# Altium PCB PCB.PcbDoc
Units mm, origin at the board's own origin, x right, y up, seen from the top; angles counter-clockwise.
Board outline 91 x 66 mm, 2 copper layers (Top Layer, Bottom Layer), stack 1.58 mm thick; 46 components, 41 nets, 152 pads, 193 vias.
Unrouted connection lines stored in the file: 4.
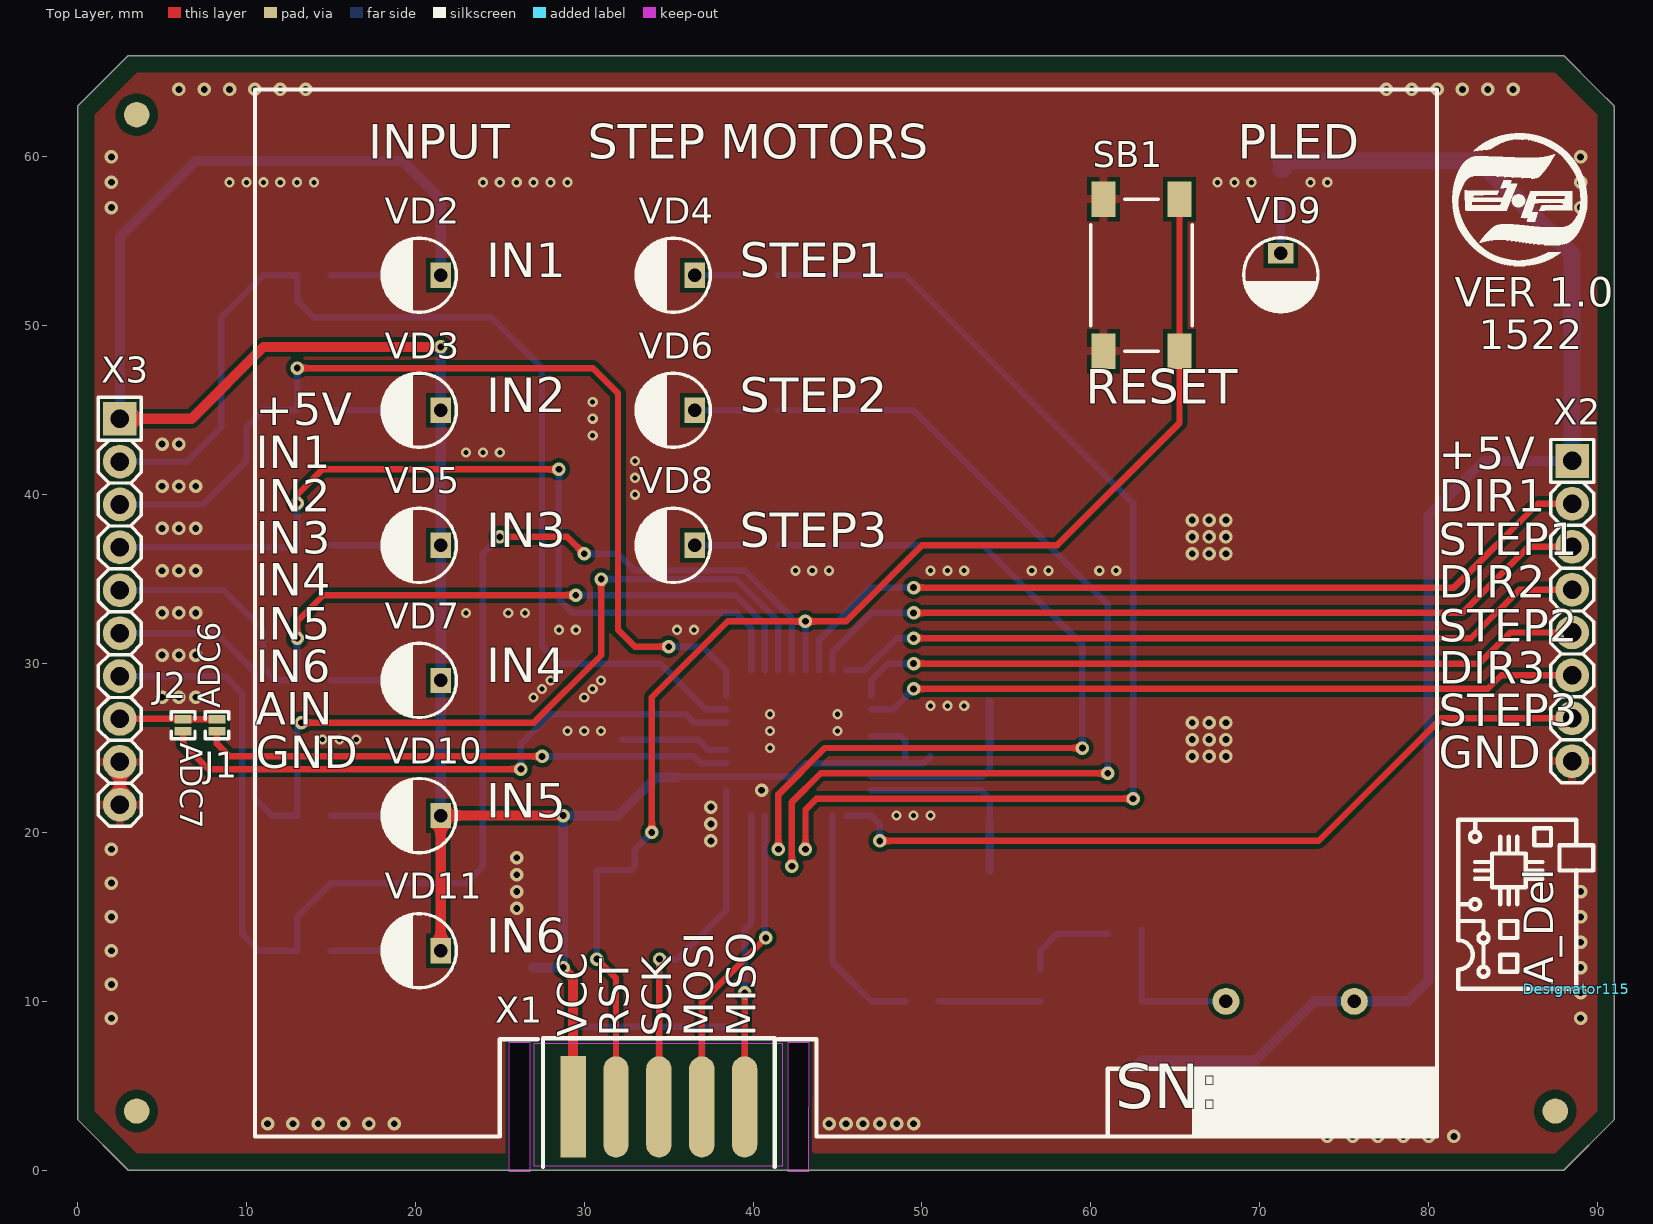
[diagram p0: Top Layer view]
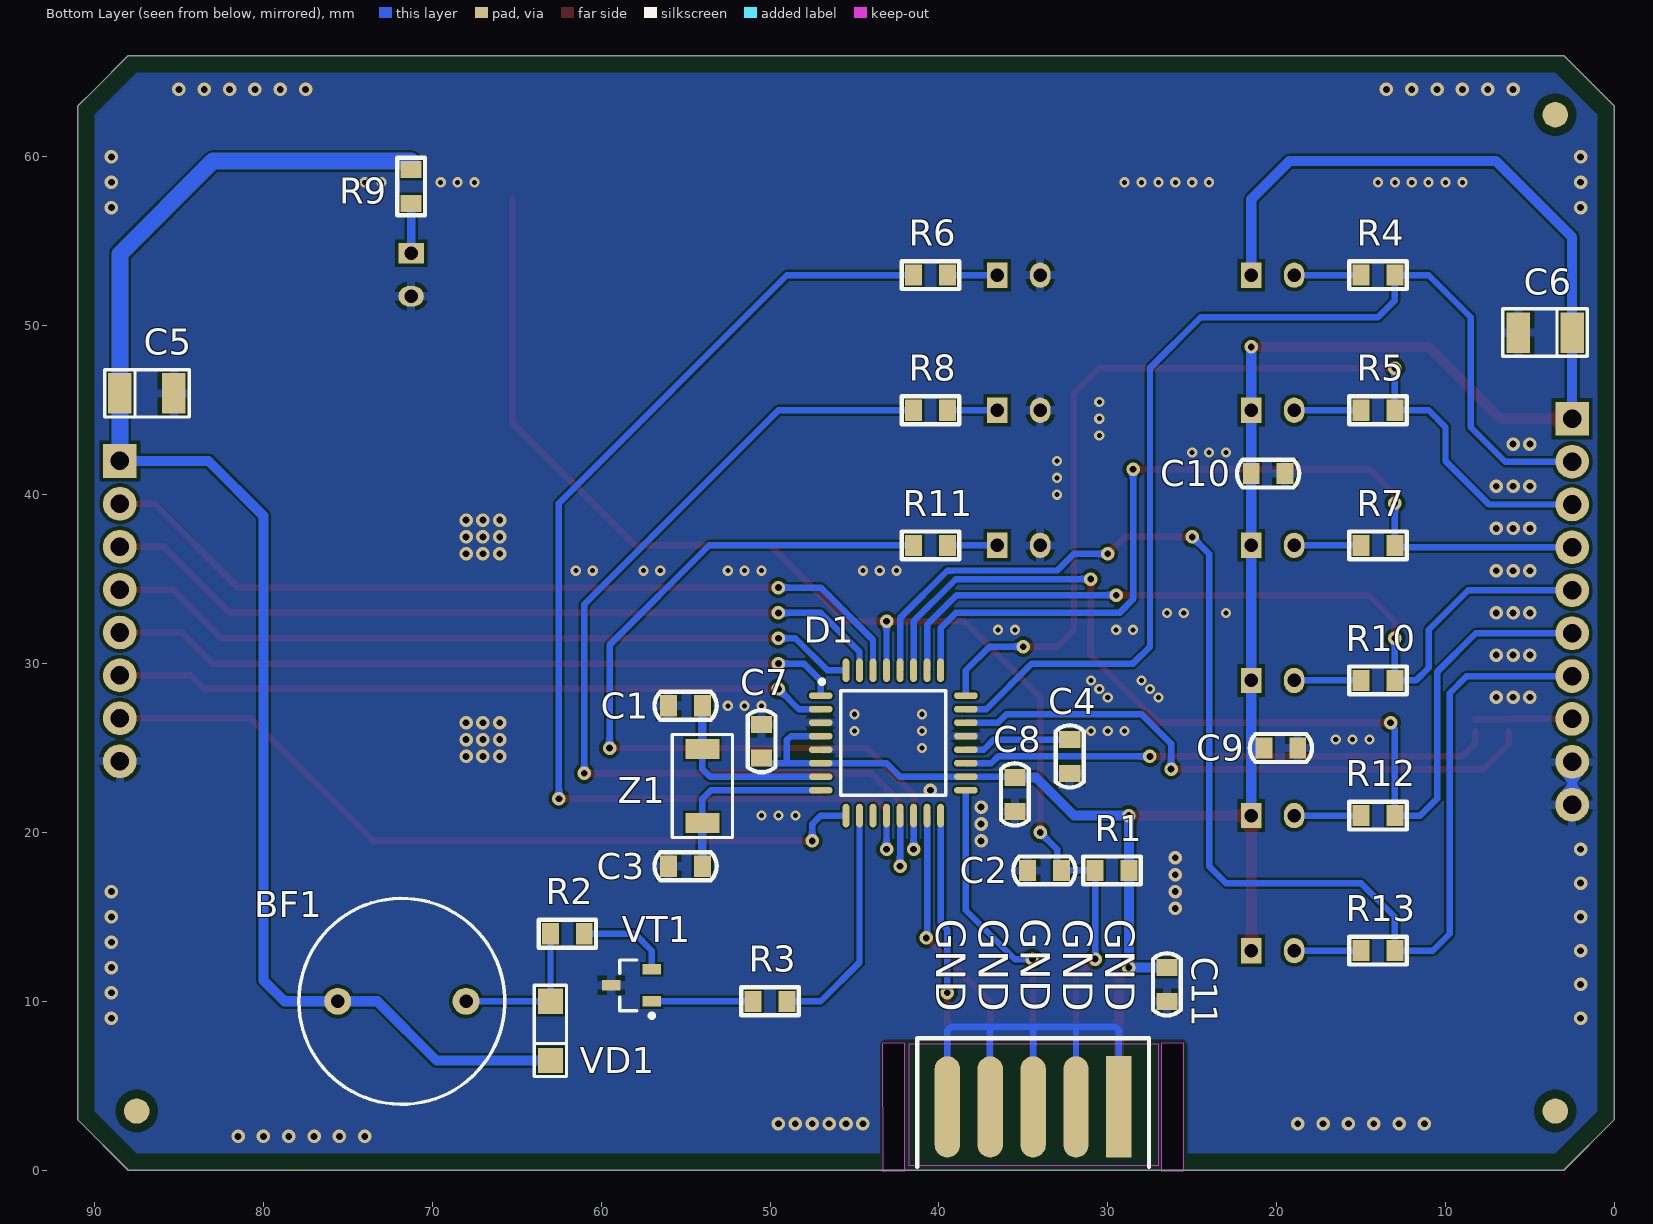
[diagram p1: Bottom Layer view, seen from below]
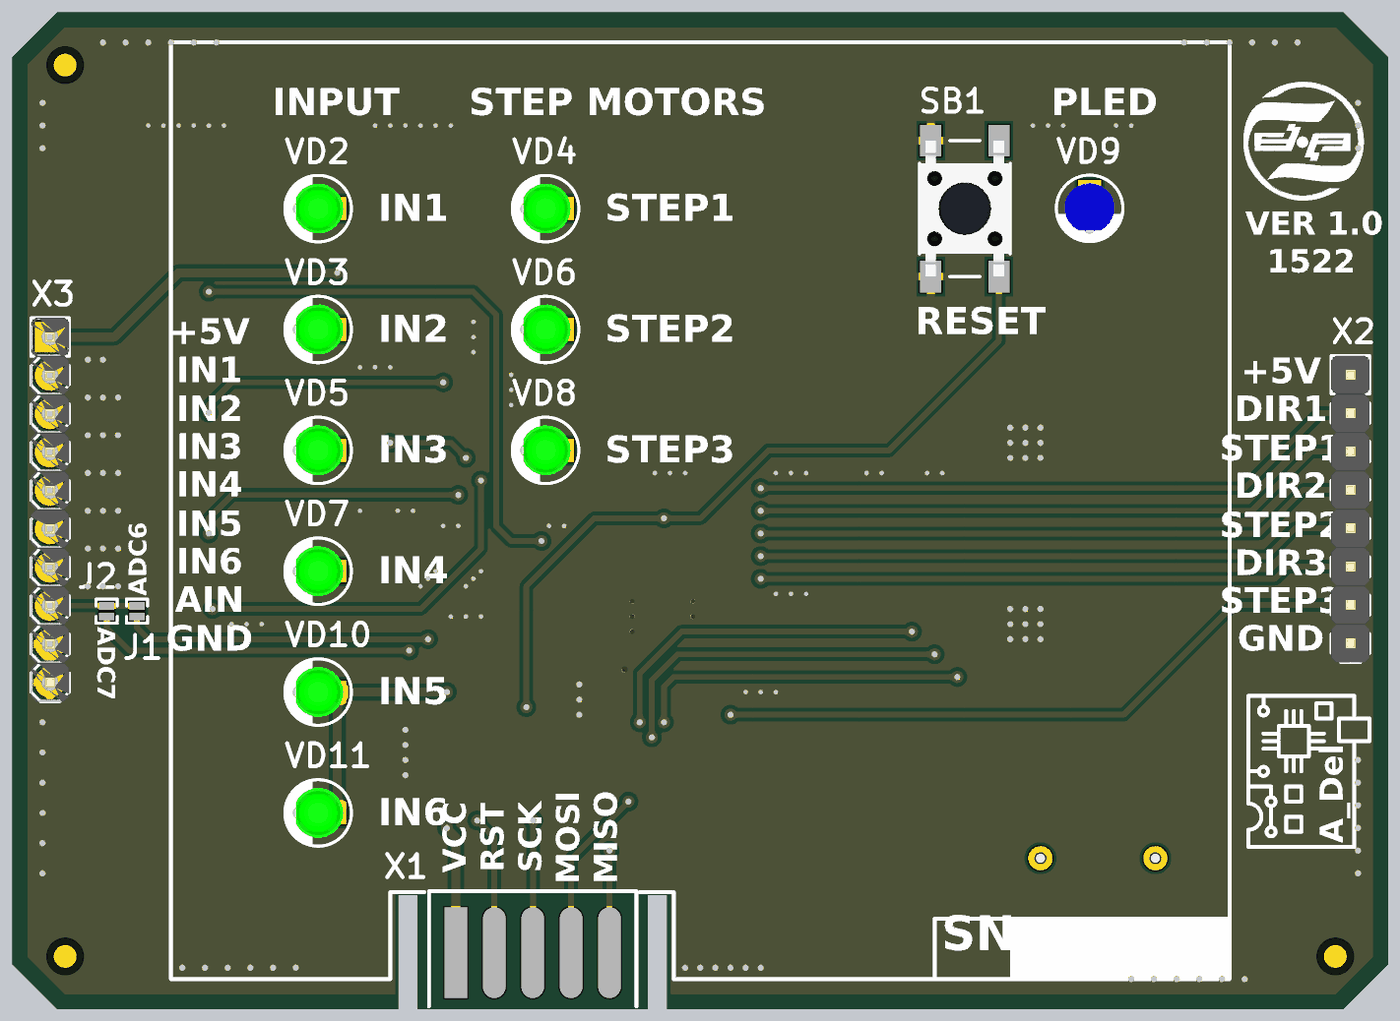
[diagram p2: 3D render of the assembled board from above, using the file's embedded part models]
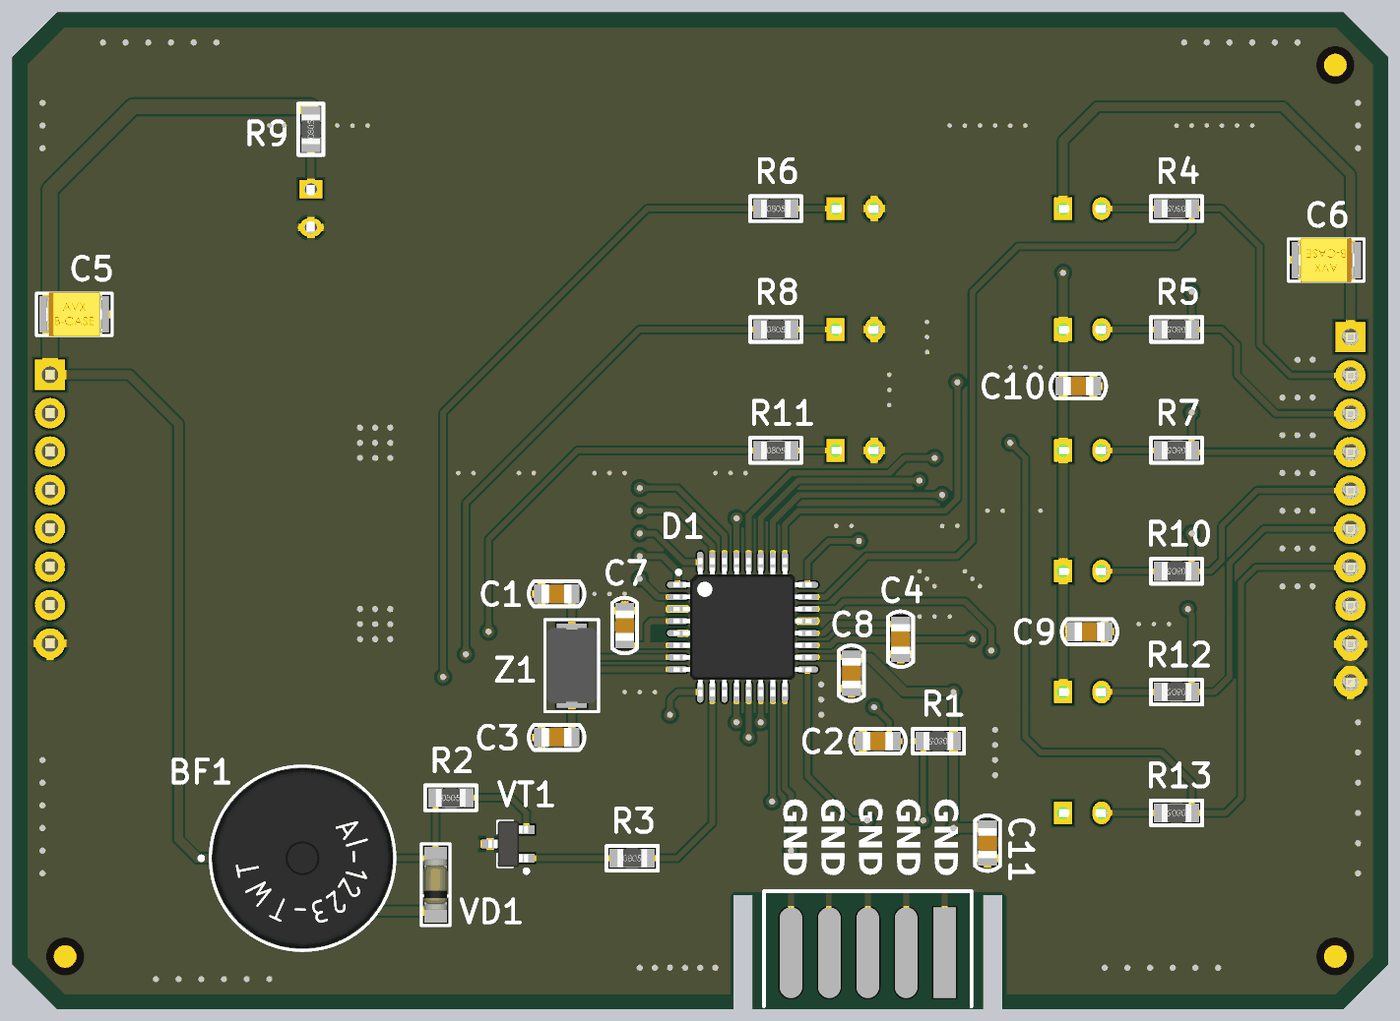
[diagram p3: 3D render of the assembled board from below, using the file's embedded part models]

## Layer stack, top to bottom
Top Solder: solder mask 0.0102, Solder Resist, Dk 3.5
Top Layer: signal copper 0.0356
Dielectric 1: dielectric 1.509, FR-4, Dk 4.8
Bottom Layer: signal copper 0.0356
Bottom Solder: solder mask 0.0102, Solder Resist, Dk 3.5

## Board outline
0,3 0,63 3,66 88,66 90,64 91,63 91,3 88,0 3,0

## Design rules (kind name [scope] priority, off if disabled: settings)
BoardOutlineClearance [All] p1: gap=0 ignorepadtopadclearanceinfootprint=FALSE
Clearance "Clearance Bottom Layer" [OnLayer('Bottom Layer')] p1: gap=0.127 ignorepadtopadclearanceinfootprint=TRUE except(0.203: THPad-THPad THPad-Via THPad-Fill THPad-Poly THPad-Region THPad-Hole Via-Via Via-Fill Via-Poly Via-Region Via-Hole Text-Hole; 0.254: THPad-Text Via-Text Text-Text)
Clearance "Clearance Top Layer" [OnLayer('Top Layer')] p2: gap=0.127 ignorepadtopadclearanceinfootprint=TRUE except(0.203: THPad-THPad THPad-Via THPad-Fill THPad-Region THPad-Hole Via-Via Via-Fill Via-Region Via-Hole Fill-Fill Fill-Region Fill-Hole Poly-Region Poly-Hole Region-Region Region-Hole Text-Hole; 0.254: Arc-Poly Track-Poly SMDPad-Poly THPad-Poly THPad-Text Via-Poly Via-Text Fill-Poly Fill-Text Poly-Poly Poly-Text Region-Text Text-Text)
Clearance [All] p3: gap=0.2 ignorepadtopadclearanceinfootprint=FALSE except(0: Text-Text; 0.127: Arc-Arc Arc-SMDPad Arc-THPad Arc-Fill Arc-Region Arc-Text Arc-Hole; 0.254: Arc-Poly THPad-Poly THPad-Text Via-Poly Via-Text Fill-Poly Fill-Text Poly-Poly Poly-Text Region-Text)
HoleSize [All] p1: absolutevalues=TRUE maxlimit=50 minlimit=0.3 maxpercent=80.000 minpercent=20.000
MinimumAnnularRing [All] p1: minimumring=0.076
MinimumSolderMaskSliver [All] p1: minsoldermaskwidth=0.1
PolygonConnect PolygonConnect_1 [All] p1: thpad.connectstyle=Relief thpad.reliefconductorwidth=0.508 thpad.reliefentries=4 thpad.polygonreliefangle="90 Angle" thpad.airgapwidth=0.254 smdpad.connectstyle=Relief smdpad.reliefconductorwidth=0.508 smdpad.reliefentries=4 smdpad.polygonreliefangle="90 Angle" smdpad.airgapwidth=0.254 via.connectstyle=Direct via.reliefconductorwidth=0.508 via.reliefentries=4 via.polygonreliefangle="90 Angle" via.airgapwidth=0.254
RoutingCorners [All] p1: cornerstyle=Round minsetback=2.54 maxsetback=2.54
RoutingVias [All] p1: holewidth=0.6 width=1 viastyle="Through Hole" minholewidth=0.3 minwidth=0.6 maxholewidth=1 maxwidth=2
SilkToSilkClearance [All] p1: silktosilkclearance=0
SilkToSolderMaskClearance [IsPad] p1: minsilkscreentomaskgap=0 clearancetoexposedcopper=TRUE
SolderMaskExpansion [All] p1: expansion=0.102 istentingtop=FALSE
Width [All] p1: maxlimit=2.54 minlimit=0.127 preferedwidth=0.381
25 further rules are at their usual default settings.

## Components (designator, comment, footprint, x,y, rotation, side; value= is the part's Value field where it differs from the comment)
BF1 "DIP switch, 2.73 kHz, 3VDC, 80mA, -20...+70°C" "BUZ: AI-1223-TWT-3V-2-R" 71.8,10 r180 bottom
C1 "Керамический SMD" "CAP: 0805" 55,27.5 r0 bottom
C2 "Керамический SMD" "CAP: 0805" 33.75,17.75 r0 bottom
C3 "Керамический SMD" "CAP: 0805" 55,18 r0 bottom
C4 "Керамический SMD" "CAP: 0805" 32.25,24.5 r270 bottom
C5 "" "CAP: TANTAL-B" 86.9,46 r180 bottom
C6 "" "CAP: TANTAL-B" 4.1,49.6 r0 bottom
C7 "Керамический SMD" "CAP: 0805" 50.5,25.4 r270 bottom
C8 "Керамический SMD" "CAP: 0805" 35.5,22.25 r90 bottom
C9 "Керамический SMD" "CAP: 0805" 19.75,25 r0 bottom
C10 "Керамический SMD" "CAP: 0805" 20.5,41.25 r0 bottom
C11 "Керамический SMD" "CAP: 0805" 26.5,11 r90 bottom
D1 "ATMega8A" 32-LQFP 42.7,25.3 r180 bottom
Designator115 "Comment" PCB_LOGO 88.75,10.75 r90 top
J1 "" "CON: JUMPER x1" 8.25,26.7 r270 top
J2 "" "CON: JUMPER x1" 6.25,26.7 r270 top
R1 "Резистор SMD, 4.7K, ±1%, 0805, 0.125W, -55...+125°C" "RES: 0805" 29.75,17.75 r0 bottom value=4.7K
R2 "Резистор SMD, 33R, ±1%, 0805, 0.125W, -55...+125°C" "RES: 0805" 62,14 r180 bottom value=33R
R3 "Резистор SMD, 1K, ±1%, 0805, 0.125W, -55...+125°C" "RES: 0805" 50,10 r180 bottom value=1K
R4 "Резистор SMD, 1K, ±1%, 0805, 0.125W, -55...+125°C" "RES: 0805" 14,53 r0 bottom value=1K
R5 "Резистор SMD, 1K, ±1%, 0805, 0.125W, -55...+125°C" "RES: 0805" 14,45 r0 bottom value=1K
R6 "Резистор SMD, 1K, ±1%, 0805, 0.125W, -55...+125°C" "RES: 0805" 40.5,53 r180 bottom value=1K
R7 "Резистор SMD, 1K, ±1%, 0805, 0.125W, -55...+125°C" "RES: 0805" 14,37 r0 bottom value=1K
R8 "Резистор SMD, 1K, ±1%, 0805, 0.125W, -55...+125°C" "RES: 0805" 40.5,45 r180 bottom value=1K
R9 "Резистор SMD, 1K, ±1%, 0805, 0.125W, -55...+125°C" "RES: 0805" 71.25,58.25 r90 bottom value=1K
R10 "Резистор SMD, 1K, ±1%, 0805, 0.125W, -55...+125°C" "RES: 0805" 14,29 r0 bottom value=1K
R11 "Резистор SMD, 1K, ±1%, 0805, 0.125W, -55...+125°C" "RES: 0805" 40.5,37 r180 bottom value=1K
R12 "Резистор SMD, 1K, ±1%, 0805, 0.125W, -55...+125°C" "RES: 0805" 14,21 r0 bottom value=1K
R13 "Резистор SMD, 1K, ±1%, 0805, 0.125W, -55...+125°C" "RES: 0805" 14,13 r0 bottom value=1K
SB1 "Tactile button, 6x6mm" "BUT: 6x6 SMD" 63,53 r270 top
VD1 "Single diode, 75V, 150mA, 1V, 4ns, SOD-80, -55...+150°C" "DIODE: SOD80" 63,8.25 r270 bottom
VD2 "LED, Green, *, *, *, -55...+150°C" "LED: 3mmG" 21.5,53 r180 top
VD3 "LED, Green, *, *, *, -55...+150°C" "LED: 3mmG" 21.5,45 r180 top
VD4 "LED, Green, *, *, *, -55...+150°C" "LED: 3mmG" 36.54,53 r180 top
VD5 "LED, Green, *, *, *, -55...+150°C" "LED: 3mmG" 21.5,37 r180 top
VD6 "LED, Green, *, *, *, -55...+150°C" "LED: 3mmG" 36.54,45 r180 top
VD7 "LED, Green, *, *, *, -55...+150°C" "LED: 3mmG" 21.5,29 r180 top
VD8 "LED, Green, *, *, *, -55...+150°C" "LED: 3mmG" 36.54,37 r180 top
VD9 "\"+5V\"" "LED: 3mmB" 71.25,54.29 r270 top
VD10 "LED, Green, *, *, *, -55...+150°C" "LED: 3mmG" 21.5,21 r180 top
VD11 "LED, Green, *, *, *, -55...+150°C" "LED: 3mmG" 21.5,13 r180 top
VT1 "NPN transistor, 45V, 100mA, 100MHz, 300mW, 0.6V, 420, SOT-23, -55...+125°C" SOT23 58.2,10.95 r0 bottom
X1 "Connector, 6pin, 2.54mm, 250VAC, 3A" "CON: PROG(PCB) ISP" 29.308,3.832 r90 top
X2 "Connector, 8pin, 2.54mm, 500VAC, 3A" "CON: PLS-8" 88.5,33.11 r270 top
X3 "Connector, 10pin, 2.54mm, 500VAC, 3A" "CON: PLS-10" 2.5,33.07 r270 top
Z1 "Crystal, 16MHz, 18pF, ±20ppm, ABM3, -40...+85°C" "OSC: 5032_ABM3" 54,22.75 r90 bottom

## Footprints (in the part's own frame and the unit in brackets; to place one, negate y for a bottom-side part, rotate by r counter-clockwise, add the part's x,y. Pads: shape width x height; smd on the part's side, far side on the other; paste and mask are expansions set on the pad)
32-LQFP [mm] "pitch 0.8 mm"
  rrect100% 1.4x0.4 smd: 1(-4.3,2.8) 2(-4.3,2) 3(-4.3,1.2) 4(-4.3,0.4) 5(-4.3,-0.4) 6(-4.3,-1.2) 7(-4.3,-2) 8(-4.3,-2.8) 17(4.3,-2.8) 18(4.3,-2) 19(4.3,-1.2) 20(4.3,-0.4) 21(4.3,0.4) 22(4.3,1.2) 23(4.3,2) 24(4.3,2.8)
  rrect100% 0.4x1.4 smd: 9(-2.8,-4.3) 10(-2,-4.3) 11(-1.2,-4.3) 12(-0.4,-4.3) 13(0.4,-4.3) 14(1.2,-4.3) 15(2,-4.3) 16(2.8,-4.3) 25(2.8,4.3) 26(2,4.3) 27(1.2,4.3) 28(0.4,4.3) 29(-0.4,4.3) 30(-1.2,4.3) 31(-2,4.3) 32(-2.8,4.3)
  round 0.5 on Mech2: ""(-4,4)
  silkscreen extent -4.35,-3.1 3.1,3.75, body extent -4.57,-4.57 4.57,4.57, height 1.62
"BUT: 6x6 SMD" [mm] "Leaded Tactile Button 6x6"
  rect 2.1x1.4 smd: 1(-4.5,2.25) 1(4.5,2.25) 2(-4.5,-2.25) 2(4.5,-2.25)
  silkscreen extent -4.5,-3 4.5,3, body extent -4.5,-3 4.5,3, height 4.3
"BUZ: AI-1223-TWT-3V-2-R" [mm]
  round 1.6 hole 0.8: 1(-3.8,0) 2(3.8,0)
  round 0.5 on Bottom Overlay: ""(-6.7,0)
  round 0.5 on Mech2: ""(-5.4,0)
  silkscreen extent -6.1,-6.1 6.1,6.1, body extent -6,-6 6,6, height 7.55
"CAP: 0805" [mm]
  rect 1x1.25 smd: 1(-1,0) 2(1,0)
  silkscreen extent -1.84,-0.82 1.84,0.82, body extent -1,-0.62 1,0.63, height 1
"CAP: TANTAL-B" [mm]
  rect 1.4x2.4 smd: 1(-1.6,0) 2(1.6,0)
  silkscreen extent -2.5,-1.4 2.5,1.4, body extent -1.85,-1.46 1.85,1.47, height 2.03
"CON: JUMPER x1" [mm]
  rect 0.5x1 smd: 1(0,0) 2(0.7,0)
  silkscreen extent -0.45,-0.7 1.15,0.7
"CON: PLS-8" [mm] "PLS-40 8 pin header"
  rect 2x2 hole 1.1: 1(-8.89,0)
  round 2 hole 1.1: 2(-6.35,0) 3(-3.81,0) 4(-1.27,0) 5(1.27,0) 6(3.81,0) 7(6.35,0) 8(8.89,0)
  silkscreen extent -10.16,-1.27 10.16,1.27, body extent -10.16,-1.27 10.16,1.27, height 8.54
"CON: PLS-10" [mm] "PLS-40 10 pin header"
  rect 2x2 hole 1.1: 1(-11.43,0)
  round 2 hole 1.1: 2(-8.89,0) 3(-6.35,0) 4(-3.81,0) 5(-1.27,0) 6(1.27,0) 7(3.81,0) 8(6.35,0) 9(8.89,0) 10(11.43,0)
  silkscreen extent -12.7,-1.27 12.7,1.27, body extent -12.7,-1.27 12.7,1.27, height 8.54
"CON: PROG(PCB) ISP" [mm] "IDC-6MS 6 pin PCB-mount connector"
  rect 6x1.5 smd: 1(-0.082,-0.032)
  oval 6x1.5 smd: 2(-0.082,-2.572) 3(-0.082,-5.112) 4(-0.082,-7.652) 5(-0.082,-10.192)
  rect 6x1.5 smd far side: 6(-0.082,-0.032)
  oval 6x1.5 smd far side: 7(-0.082,-2.572) 8(-0.082,-5.112) 9(-0.082,-7.652) 10(-0.082,-10.192)
  Keep-Out Layer board cut-out: -3.892,-14.003 -3.889,-14 3.728,-14.003 3.728,-12.732 1.188,-12.732 -3.892,-12.732
  Keep-Out Layer board cut-out: -3.892,2.507 -3.889,2.51 3.728,2.507 3.728,3.778 1.188,3.778 -3.892,3.778
  silkscreen extent -3.64,-11.97 3.98,1.75
"DIODE: SOD80" [mm]
  rect 1.5x1.5 smd: 1(-1.75,0) 2(1.75,0)
  silkscreen extent -2.7,-0.95 2.7,0.95, body extent -1.68,-0.78 1.68,0.76, height 1.52
"LED: 3mmB" [mm]
  rect 1.2x1.5 hole 0.8: 1(0,0)
  oval 1.2x1.5 hole 0.8: 2(2.54,0)
  silkscreen extent -0.93,-2.2 3.47,2.2, body extent -0.39,-1.65 2.82,1.64, height 4.98
"LED: 3mmG" [mm]
  rect 1.2x1.5 hole 0.8: 1(0,0)
  oval 1.2x1.5 hole 0.8: 2(2.54,0)
  silkscreen extent -0.93,-2.2 3.47,2.2, body extent -0.39,-1.65 2.82,1.64, height 4.98
"OSC: 5032_ABM3" [mm]
  rect 1.2x2 smd: 1(-2.197,0) 2(2.197,0)
  silkscreen extent -3.05,-1.78 3.05,1.78, body extent -2.5,-1.65 2.5,1.65, height 1.3
PCB_LOGO [mm]
  silkscreen extent 0,-1 10,7
"RES: 0805" [mm]
  rect 1x1.25 smd: 1(-1,0) 2(1,0)
  silkscreen extent -1.7,-0.82 1.7,0.82, body extent -1,-0.6 1,0.6, height 0.44
SOT23 [mm]
  rect 1.1x0.6 smd: 1(-1.2,0.95) 2(-1.2,-0.95) 3(1.2,0)
  round 0.5 on Mech2: ""(-0.9,1.1)
  silkscreen extent -1.32,-1.5 0.7,1.92, body extent -1.32,-1.52 1.32,1.52, height 1.12

## Part data
BF1: library part Buzzer, CurrentMax=80mA, Frequency="2.73 kHz", Manufacturer="PUI Audio", PartNumber=AT-0927-TT-6-R, Temperature=-20...+70°C, VoltageMax=3VDC, HelpURL=https://www.digikey.com/products/en?keywords=AT-0927-TT-6-R, TypeBuzzer="DIP switch", ValueManufacturerPartNumber="DIP switch, 2.73 kHz, 3VDC, 80mA, -20...+70°C"
C5 C6: library part "Танталы SMD", Значение=22uF, Напряжение=10V, Производитель=AVX, Ссылка=***, ТипКомпонента="Tantalum capacitor", Типоразмер="Тип А (3216)", Точность=±10%, УникальныйНомер=F930J107KAAAJ6
D1: library part ATmega8, "Корпус TQFP-44, Ядро AVR, Максимальная частота ядра 20 МГц, Объём памяти программ 65.54 кБайт, Объём EEPROM памяти 2.05 кБайт, Объём оперативной памяти 4.1 кБайт, Интерфейсы I²C, SPI, UART/USART, Периферия Brown-out Detect/Reset, POR, PWM, WDT, АЦП/ЦАП A/D 8x10b, Напряжение питания, min 2.7 В, Напряжение питания, max 5.5 В"
J1 J2: library part Jumper_2_pin
  J1: CommentText="\"ADC6\""
  J2: CommentText="\"ADC7\""
R1 R2 R4 R5 R6 R7 R8 R9 R10 R11 R12 R13: library part Resistor_0805_ieee, Manufacturer="Vishay Intertech", Package=0805, PartNumber=CRCW080533R0FKEA, Power=0.125W, Temperature=-55...+125°C, Tolerance=±1%, TypeResistor="Резистор SMD", HelpURL=https://www.digikey.com/product-detail/en/yageo/RC0805JR-07100RL/311-100ARCT-ND/731185
  R1: ValueManufacturerPartNumber="Резистор SMD, 4.7K, ±1%, 0805, 0.125W, -55...+125°C"
  R2: ValueManufacturerPartNumber="Резистор SMD, 33R, ±1%, 0805, 0.125W, -55...+125°C"
  R4 R5 R6 R7 R8 R9 R10 R11 R12 R13: ValueManufacturerPartNumber="Резистор SMD, 1K, ±1%, 0805, 0.125W, -55...+125°C"
R3: library part Resistor_0805_ieee, Manufacturer="Vishay Intertech", Package=0805, PartNumber=CRCW08051K00JNEA, Power=0.125W, Temperature=-55...+125°C, Tolerance=±1%, TypeResistor="Резистор SMD", HelpURL=https://www.digikey.com/product-detail/en/yageo/RC0805JR-07100RL/311-100ARCT-ND/731185, ValueManufacturerPartNumber="Резистор SMD, 1K, ±1%, 0805, 0.125W, -55...+125°C"
SB1: library part Button_tactile, Manufacturer="TE Connectivity", Package=6x6mm, PartNumber=FSM2JSMAATR, CommentText="\"RESET\"", HelpURL=https://www.digikey.com/product-detail/en/te-connectivity-alcoswitch-switches/FSM2JSMAATR/450-1792-1-ND/3503931, TypeButton="Tactile button", ValueManufacturerPartNumber="Tactile button, 6x6mm"
VD1: library part Diode_single, Current=150mA, Manufacturer="Vishay Intertech", Package=SOD-80, PartNumber=LL4148-M-08, Temperature=-55...+150°C, Voltage=75V, VoltageDrop=1V, HelpURL=https://www.digikey.com/product-detail/en/micro-commercial-co/1N4148WX-TP/1N4148WXTPMSCT-ND/717312, RecoveryTime=4ns, TypeDiode="Single diode", ValueManufacturerPartNumber="Single diode, 75V, 150mA, 1V, 4ns, SOD-80, -55...+150°C"
VD2 VD3 VD4 VD5 VD6 VD7 VD8 VD10 VD11: library part LED_single, Color=GREEN, ColorParameter=Green, Temperature=-55...+150°C, TypeDiode=LED, ValueManufacturerPartNumber="LED, Green, *, *, *, -55...+150°C"
VD9: library part LED_single, Color=GREEN, ColorParameter=Green, Temperature=-55...+150°C, ValueManufacturerPartNumber="LED, Green, *, *, *, -55...+150°C", TypeDiode=LED
VT1: library part BJT_NPN_123, CurrentCE=100mA, CurrentGain=420, Frequency=100MHz, Manufacturer="ON Semiconductor", MaxPower=300mW, Package=SOT-23, PartNumber=BC847, Temperature=-55...+125°C, VoltageCE=45V, VoltageSaturation=0.6V, HelpURL=https://www.digikey.com/product-detail/en/on-semiconductor/BC847CLT1G/BC847CLT1GOSCT-ND/917836, TypeTransistor="NPN transistor", ValueManufacturerPartNumber="NPN transistor, 45V, 100mA, 100MHz, 300mW, 0.6V, 420, SOT-23, -55...+125°C"
X1: library part Connector_ISP_PCB, CurrentMax=3A, Manufacturer=Connfly, PartNumber=IDC-6, VoltageMax=250VAC, CommentText="\"Разъем\"", HelpURL=https://ru.aliexpress.com/item/1719644716.html?spm=a2g0v.search0104.3.23.4d9c1bc6xlIt6Q&ws_ab_test=searchweb0_0%2Csearchweb201602_10_10065_10068_319_317_10696_453_10084_454_10083_10618_10307_10301_537_536_10059_10884_10887_321_322_10915_10103_10914_10911_10910%2Csearchweb201603_52%2CppcSwitch_0&algo_expid=18a75006-9775-490c-9b34-8e5eba9edd8d-3&algo_pvid=18a75006-9775-490c-9b34-8e5eba9edd8d&transAbTest=ae803_5, Multichannel=6pin, Pitch=2.54mm, TypeConnector=Connector, ValueManufacturerPartNumber="Connector, 6pin, 2.54mm, 250VAC, 3A"
X2: library part PLS-8, CurrentMax=3A, Manufacturer=Connfly, VoltageMax=500VAC, CommentText="\"Разъем\"", HelpURL=https://www.chipdip.ru/product/pls-8-ds1021-1-8sf112, Multichannel=8pin, PartNumber=PLS-8, Pitch=2.54mm, TypeConnector=Connector, ValueManufacturerPartNumber="Connector, 8pin, 2.54mm, 500VAC, 3A"
X3: library part PLS-10, CurrentMax=3A, Manufacturer=Connfly, VoltageMax=500VAC, CommentText="\"MainBoard_INPUT\"", HelpURL=https://www.chipdip.ru/product/pls-10, Multichannel=10pin, PartNumber=PLS-10, Pitch=2.54mm, TypeConnector=Connector, ValueManufacturerPartNumber="Connector, 10pin, 2.54mm, 500VAC, 3A"
Z1: library part Crystal_5032_ABM3, Frequency=16MHz, LoadCapacitance=18pF, Manufacturer="ABRACON LLC", Package=ABM3, PartNumber=ABM3-16.000MHZ-D2Y-T, Temperature=-40...+85°C, Tolerance=±20ppm, HelpURL=https://www.digikey.com/product-detail/en/epson/FC-135-32.7680KA-A5/SER4103CT-ND/6188447, TypeOscilator=Crystal, ValueManufacturerPartNumber="Crystal, 16MHz, 18pF, ±20ppm, ABM3, -40...+85°C"
C1 C3: Значение=22pF, Напряжение=16V, Производитель=Yageo, Ссылка=***, ТипДиэлектрика=X7R, ТипКомпонента="Ceramic capacitor", Типоразмер=0201, Точность=±10%, УникальныйНомер=CC0201KRX7R7BB103
C2: Значение=10nF, Напряжение=16V, Производитель=Yageo, Ссылка=***, ТипДиэлектрика=X7R, ТипКомпонента="Ceramic capacitor", Типоразмер=0201, Точность=±10%, УникальныйНомер=CC0201KRX7R7BB103
C4 C7 C8 C9 C10 C11: Значение=0.1uF, Напряжение=16V, Производитель=Yageo, Ссылка=***, ТипДиэлектрика=X7R, ТипКомпонента="Ceramic capacitor", Типоразмер=0201, Точность=±10%, УникальныйНомер=CC0201KRX7R7BB103

## Free pads (board coordinates)
  rrect100% 1.5x1.5 all layers, no hole mask+0.5: 2(3.5,3.5) 2(3.5,62.5) 2(87.5,3.5)

## Via types
v1: diameter 0.8, hole 0.4, Top Layer to Bottom Layer, tented both sides, 127 vias
v2: diameter 0.6, hole 0.3, Top Layer to Bottom Layer, tented both sides, 66 vias

## Nets (pads, with @x,y where several pads share a name; then routed paths per layer and width w, separated by ;. In a path a pad name is that pad's centre, name@x,y a point inside that pad or via, vN(x,y) a via of type N, cw(c..) or ccw(c..) an arc to the next point about the centre after c; other vN are vias at no path point)
+5V: BF1.1 C5.1 C6.1 C7.2 C8.2 C9.2 C10.2 C11.2 D1.4 D1.6 D1.18 R1.1 R9.2 VD1.2 VD2.1 VD3.1 VD5.1 VD7.1 VD10.1 VD11.1 X1.1 X2.1 X3.1 | length 235.6
  Top Layer w0.6: X3.1 6.75,44.5 11,48.75 v1(21.5,48.75) ; VD11.1 VD10.1 v1(28.75,21) ; v1(28.75,12) 28.75,11.946 29.34,11.356 X1.1
  Bottom Layer w0.381: C8.2 35.55,23.3 D1.18 42.3,23.3 43.1,24.1 D1.6 49,24.1 ; D1.4 48.777,25.7 49,25.477 49,24.1 ; C7.2@50.5,24.5 50.1,24.1 49,24.1
  Bottom Layer w0.6: X3.1 C6.1 2.5,55.25 7,59.75 19.25,59.75 21.5,57.5 VD2.1 ; VD10.1 VD7.1 VD5.1 C10.2 VD3.1 v1(21.5,48.75) ; C11.2@26.973,12 v1(28.75,12) v1(28.75,21) 32,21 34.25,23.25 C8.2 ; VD1.2@62.55,6.05 VD1.2 69.75,6.5 73.25,10 BF1.1 78.75,10 80,11.25 80,38.75 83.25,42 X2.1
  Bottom Layer w1: R9.2 R9.2@71.375,59.25 ; R9.2@71.25,59.75 83,59.75 88.5,54.25 C5.1 X2.1
AIN_ADC6: D1.19 J1.2 | length 31.4
  Top Layer w0.381: J1.2 8.25,25.941 8.25,25.25 9,24.5 v1(27.5,24.5)
  Bottom Layer w0.381: v1(27.5,24.5) 36.5,24.5 36.9,24.1 D1.19
AIN_ADC7: D1.22 J2.2 | length 36
  Top Layer w0.381: J2.2 6.25,25.25 7.75,23.75 v1(26.25,23.75)
  Bottom Layer w0.381: v1(26.25,23.75) 26.25,25.25 28,27 36,27 36.5,26.5 D1.22
DIR1: D1.30 X2.2 | length 49.7
  Top Layer w0.381: v1(49.5,34.5) 81.5,34.5 86.46,39.46 X2.2
  Bottom Layer w0.381: D1.30 43.9,31.4 47,34.5 v1(49.5,34.5)
DIR2: D1.32 X2.4 | length 45
  Top Layer w0.381: v1(49.5,31.5) 82.5,31.5 85.38,34.38 X2.4
  Bottom Layer w0.381: D1.32 46.6,29.6 48.5,31.5 v1(49.5,31.5)
DIR3: D1.2 X2.6 | length 42.3
  Top Layer w0.381: v1(49.5,28.5) 83.5,28.5 84.3,29.3 X2.6
  Bottom Layer w0.381: D1.2 48.3,27.3 v1(49.5,28.5)
GND: C1.2 C2.2 C3.2 C4.2 C5.2 C6.2 C7.1 C8.1 C9.1 C10.1 C11.1 D1.3 D1.5 D1.21 pad.2 SB1.2 VD4.2 VD6.2 VD8.2 VD9.2 VT1.3 X1.6 X1.7 X1.8 X1.9 X1.10 X2.8 X3.9 X3.10 | length 38.7
  Top Layer w0.381: X3.10 X3.9
  Bottom Layer w0.381: X3.10 X3.9 ; X1.6 29.34,8.277 29.563,8.5 34.42,8.5 ; X1.7 31.88,8.5 ; X1.8 34.42,8.5 ; X1.9 37,3.79 37,8.5 ; X1.10 39.5,8.277 39.277,8.5 37,8.5 ; 34.42,8.5 37,8.5
  other v1: 74,2 75.5,2 77,2 78.5,2 80,2 81.5,2 11.25,2.75 12.75,2.75 14.25,2.75 15.75,2.75 17.25,2.75 18.75,2.75 44.5,2.75 45.5,2.75 46.5,2.75 47.5,2.75 48.5,2.75 49.5,2.75 2,9 89,9 89,10.5 2,11 89,12 2,13 89,13.5 2,15 89,15 26,15.5 26,16.5 89,16.5 2,17 26,17.5 26,18.5 2,19 37.5,19.5 37.5,20.5 37.5,21.5 40.5,22.5 66,24.5 67,24.5 68,24.5 66,25.5 67,25.5 68,25.5 66,26.5 67,26.5 68,26.5 5,28 6,28 7,28 5,30.5 6,30.5 7,30.5 5,33 6,33 7,33 5,35.5 6,35.5 7,35.5 66,36.5 67,36.5 68,36.5 66,37.5 67,37.5 68,37.5 5,38 6,38 7,38 66,38.5 67,38.5 68,38.5 5,40.5 6,40.5 7,40.5 5,43 6,43 2,57 89,57 2,58.5 89,58.5 2,60 89,60 6,64 7.5,64 9,64 10.5,64 12,64 13.5,64 77.5,64 79,64 80.5,64 82,64 83.5,64 85,64
  other v2: 48.5,21 49.5,21 50.5,21 41,25 14.5,25.5 15.5,25.5 16.5,25.5 29,26 30,26 31,26 41,26 45,26 41,27 45,27 50.5,27.5 51.5,27.5 52.5,27.5 27,28 30,28 27.5,28.5 30.5,28.5 28,29 31,29 28.5,32 29.5,32 35.5,32 36.5,32 23,33 25.5,33 26.5,33 42.5,35.5 43.5,35.5 44.5,35.5 50.5,35.5 51.5,35.5 52.5,35.5 56.5,35.5 57.5,35.5 60.5,35.5 61.5,35.5 33,40 33,41 33,42 23,42.5 24,42.5 25,42.5 30.5,43.5 30.5,44.5 30.5,45.5 9,58.5 10,58.5 11,58.5 12,58.5 13,58.5 14,58.5 24,58.5 25,58.5 26,58.5 27,58.5 28,58.5 29,58.5 67.5,58.5 68.5,58.5 69.5,58.5 73,58.5 74,58.5
IN1: D1.23 R4.1 X3.2 | length 65.5
  Bottom Layer w0.381: X3.2 6.46,41.96 8.5,44 8.5,50.5 11,53 R4.1 13,51.5 14,50.5 24.5,50.5 27.5,47.5 27.5,31 28.5,30 34.5,30 37.2,27.3 D1.23
IN2: D1.24 R5.1 X3.3 | length 59
  Top Layer w0.381: v1(13,47.5) 30.5,47.5 32,46 32,32 33,31 v1(35,31)
  Bottom Layer w0.381: X3.3 7.42,39.42 10,42 10,44 11,45 R5.1 v1(13,47.5) ; v1(35,31) 37,31 38.4,29.6 D1.24
IN3: D1.25 R7.1 X3.4 | length 51.8
  Top Layer w0.381: v1(13,39.5) 13,40 14.5,41.5 v1(28.5,41.5)
  Bottom Layer w0.381: X3.4 R7.1@12.88,36.88 ; R7.1 v1(13,39.5) ; v1(28.5,41.5) 28.5,33.8 29.3,33 39,33 39.9,32.1 D1.25
IN4: D1.26 R10.1 X3.5 | length 49.3
  Top Layer w0.381: v1(13,31.5) 13,32.5 14.549,34.049 v1(29.499,34.049)
  Bottom Layer w0.381: X3.5 8.66,34.34 11,32 11,29.75 11.75,29 R10.1 v1(13,31.5) ; v1(29.499,34.049) 38.951,34.049 40.7,32.3 D1.26
IN5: D1.27 R12.1 X3.6 | length 63.3
  Top Layer w0.381: v1(13.25,26.5) 27,26.5 31,30.5 v1(31,35.002)
  Bottom Layer w0.381: X3.6 8.2,31.8 10.5,29.5 10.5,22 11.5,21 R12.1 13,26.137 13.25,26.387 v1(13.25,26.5) ; v1(31,35.002) 38.998,35.002 41.5,32.5 D1.27
IN6: D1.28 R13.1 X3.7 | length 82.1
  Top Layer w0.381: v1(25,37.5) 29,37.5 v1(30,36.5)
  Bottom Layer w0.381: X3.7 8.74,29.26 9.75,28.25 9.75,14 10.75,13 R13.1 13,15 15,17 23,17 24,18 24,36.5 v1(25,37.5) ; v1(30,36.5) 32,36.5 32.99,35.51 39.209,35.51 39.218,35.5 39.5,35.5 42.3,32.7 D1.28
MISO: D1.16 X1.5 | length 17.5
  Top Layer w0.381: X1.5 v1(39.5,10.5)
  Bottom Layer w0.381: v1@39.5,10.391 v1(39.5,10.5) 39.5,14.25 39.9,14.65 D1.16
MOSI: D1.15 X1.4 | length 18.8
  Top Layer w0.381: X1.4 36.96,9.96 v1(40.75,13.75)
  Bottom Layer w0.381: v1@40.7,13.8 D1.15
NetBF1_2: BF1.2 R2.1 VD1.1 | length 9.2
  Bottom Layer w0.381: R2.1@63,14.25 R2.1 VD1.1 BF1.2
NetC4_1: C4.1 D1.20 | length 6.4
  Bottom Layer w0.381: C4.1@32.237,25.5 36.75,25.5 37.35,24.9 D1.20
NetJ1_1: J1.1 J2.1 X3.8 | length 5.7
  Top Layer w0.381: X3.8 J2.1@6.23,26.72 ; J2.1 J1.1
NetR2_2: R2.2 VT1.2 | length 5.5
  Bottom Layer w0.381: VT1.2 57,13 58,14 R2.2
NetR3_1: R3.1 VT1.1 | length 6
  Bottom Layer w0.381: R3.1 VT1.1
NetR4_2: R4.2 VD2.2 | length 4
  Bottom Layer w0.381: R4.2 VD2.2@19,53
NetR5_2: R5.2 VD3.2 | length 4
  Bottom Layer w0.381: R5.2 VD3.2@19,45
NetR6_2: R6.2 VD4.1 | length 3
  Bottom Layer w0.381: VD4.1 R6.2
NetR7_2: R7.2 VD5.2 | length 4
  Bottom Layer w0.381: R7.2 VD5.2@19,37
NetR8_2: R8.2 VD6.1 | length 3
  Bottom Layer w0.381: VD6.1 R8.2
NetR9_1: R9.1 VD9.1 | length 3
  Bottom Layer w0.5: VD9.1 R9.1
NetR10_2: R10.2 VD7.2 | length 4
  Bottom Layer w0.381: R10.2 VD7.2@19,29
NetR11_2: R11.2 VD8.1 | length 3
  Bottom Layer w0.381: VD8.1 R11.2
NetR12_2: R12.2 VD10.2 | length 4
  Bottom Layer w0.381: R12.2 VD10.2@19,21
NetR13_2: R13.2 VD11.2 | length 4
  Bottom Layer w0.381: R13.2 VD11.2@19,13
RESET: C2.1 D1.29 R1.2 SB1.1 X1.2 | length 81.4
  Top Layer w0.381: v1(30.75,12.5) 31.88,11.37 X1.2 ; v1(34,20) 34,28 38.5,32.5 v1(43.1,32.5) 45.5,32.5 50,37 58,37 65.25,44.25 65.25,48.5 SB1.1@65.25,57.5
  Bottom Layer w0.381: v1(30.75,12.5) R1.2 C2.1 33,18 33,19 v1(34,20) ; D1.29 v1(43.1,32.5)
SCK: D1.17 X1.3 | length 21
  Top Layer w0.381: X1.3 34.442,3.772 34.442,12.478 v1(34.463,12.5)
  Bottom Layer w0.381: v1(34.463,12.5) 35.5,12.5 38.4,15.4 D1.17
SOUND: D1.10 R3.2 | length 14
  Bottom Layer w0.381: D1.10 44.7,12.3 47,10 R3.2
STEP1: D1.31 X2.3 | length 47.5
  Top Layer w0.381: v1(49.5,33) 82,33 85.92,36.92 X2.3
  Bottom Layer w0.381: D1.31 44.7,30.7 47,33 v1(49.5,33)
STEP1_LED: D1.12 R6.1 | length 68.1
  Top Layer w0.381: v1(43.1,19) 43.1,21.35 43.75,22 v1(62.5,22)
  Bottom Layer w0.381: R6.1 49,53 62.5,39.5 v1(62.5,22) ; v1(43.1,19) D1.12
STEP2: D1.1 X2.5 | length 43.6
  Top Layer w0.381: v1(49.5,30) 83,30 84.84,31.84 X2.5
  Bottom Layer w0.381: D1.1 47,29 48,30 v1(49.5,30)
STEP2_LED: D1.13 R8.1 | length 60.5
  Top Layer w0.381: v1(42.3,18) 42.3,21.8 44,23.5 v1(61,23.5)
  Bottom Layer w0.381: R8.1 49.5,45 61,33.5 v1(61,23.5) ; v1(42.3,18) D1.13
STEP3: D1.9 X2.7 | length 47.2
  Top Layer w0.381: v1(47.5,19.5) 73.5,19.5 80.76,26.76 X2.7
  Bottom Layer w0.381: D1.9 47,21 47.5,20.5 v1(47.5,19.5)
STEP3_LED: D1.14 R11.1 | length 50.9
  Top Layer w0.381: v1(41.5,19) 41.5,22.25 44.25,25 v1(59.5,25)
  Bottom Layer w0.381: v1(41.5,19) D1.14 ; R11.1 53.6,37 59.5,31.1 v1(59.5,25)
XTAL1: C1.1 D1.7 Z1.2 | length 11.2
  Bottom Layer w0.381: D1.7 53.55,23.3 54,23.75 Z1.2
  Bottom Layer w0.5: Z1.2 C1.1@54,27.75
XTAL2: C3.1 D1.8 Z1.1 | length 11.4
  Bottom Layer w0.381: D1.8 53.5,22.5 ; 53.528,22.472 54,22 Z1.1
  Bottom Layer w0.5: C3.1@54,17.75 Z1.1
pads on no net: BF1. D1. D1.11 VT1.

## Polygon pours and split planes (outlines as drawn)
GND on Top Layer "NONET_L-01_P-001" (solid, pour order 6): 1,62.5 3.5,65 87.5,65 90,62.5 90,3.5 87.5,1 3.5,1 1,3.5
GND on Bottom Layer "NONET_L-01_P-002" (solid, pour order 7): 25.25,1 25.25,7.5 25.5,7.75 43.258,7.75 43.508,7.5 43.508,1 87.5,1 90,3.5 90,62.5 87.5,65 3.5,65 1,62.5 1,3.5 3.5,1

## Keep-outs
Top Layer:
  rectangle: 27,0.25 41.75,7.5
Bottom Layer:
  rectangle: 27,0.25 41.75,7.5

## Silkscreen, mask and mechanical layers (free items; w line width, h text height)
Top Overlay:
  drawing of 19 lines, arcs and shapes, not listed
  text "INPUT" at 17.2,59.2 h3.5
  text "STEP MOTORS" at 30.2,59.2 h3.5
  text "PLED" at 68.7,59.2 h3.5
  text "IN1" at 24.2,52.2 h3.5
  text "STEP1" at 39.2,52.2 h3.5
  text "VER 1.0" at 81.54,50.537 h3
  text "1522" at 82.978,48.034 h3
  text "RESET" at 59.7,44.7 h3.5
  text "IN2" at 24.2,44.2 h3.5
  text "STEP2" at 39.2,44.2 h3.5
  text "+5V" at 10.55,43.45 h3.3
  text "IN1" at 10.55,40.919 h3.3
  text "+5V" at 80.6,40.85 h3.3
  text "IN2" at 10.55,38.35 h3.3
  text "DIR1" at 80.6,38.35 h3.3
  text "IN3" at 24.2,36.2 h3.5
  text "STEP3" at 39.2,36.2 h3.5
  text "IN3" at 10.55,35.85 h3.3
  text "STEP1" at 80.6,35.75 h3.3
  text "IN4" at 10.55,33.35 h3.3
  text "DIR2" at 80.6,33.25 h3.3
  text "IN5" at 10.55,30.75 h3.3
  text "STEP2" at 80.6,30.65 h3.3
  text "IN6" at 10.55,28.25 h3.3
  text "IN4" at 24.2,28.2 h3.5
  text "DIR3" at 80.6,28.15 h3.3
  text "ADC6" at 8.875,27.368 h2.3 r90
  text "AIN" at 10.55,25.719 h3.3
  text "STEP3" at 80.6,25.65 h3.3
  text "ADC7" at 5.633,25.326 h2.3 r270
  text "GND" at 10.55,23.15 h3.3
  text "GND" at 80.6,23.15 h3.3
  text "IN5" at 24.2,20.2 h3.5
  text "IN6" at 24.2,12.2 h3.5
  text "SN:" at 61.446,2.802 h4.5
Border:
  the board outline again, w0.2

## Dimensions
0,66 to 91,66 on Size
0,0 to 0,66 on Size
91,0 to 91.5,33 on Size
0,0 to 0.5,33 on Size

## Text inside footprints (layer, text, board x,y; h text height)
Designator115: Top Overlay "A_Del" at 87.984,11.007 h3 r90
X1: Top Overlay "MISO" at 40.74,7.89 h3 r90; Top Overlay "MOSI" at 38.24,7.89 h3 r90; Top Overlay "SCK" at 35.74,7.909 h3 r90; Top Overlay "RST" at 33.24,7.89 h3 r90; Top Overlay "VCC" at 30.74,7.89 h3 r90; Bottom Overlay "GND" at 30.74,14.89 h3 r90; Bottom Overlay "GND" at 33.24,14.89 h3 r90; Bottom Overlay "GND" at 35.74,14.909 h3 r90; Bottom Overlay "GND" at 38.24,14.89 h3 r90; Bottom Overlay "GND" at 40.74,14.89 h3 r90